# Altium PCB SHT20.PcbDoc
Units mil, origin at the board's own origin, x right, y up, seen from the top; angles counter-clockwise.
Board outline 530 x 835 mil, 2 copper layers (Top Layer, Bottom Layer); 6 components, 4 nets, 19 pads, 4 vias.
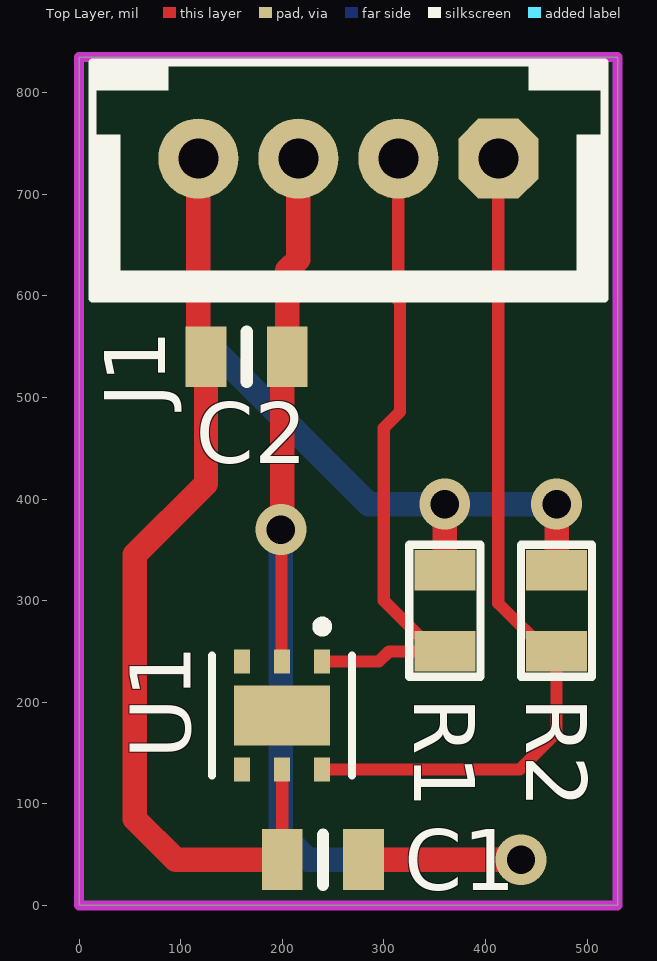
[diagram p0: Top Layer view]
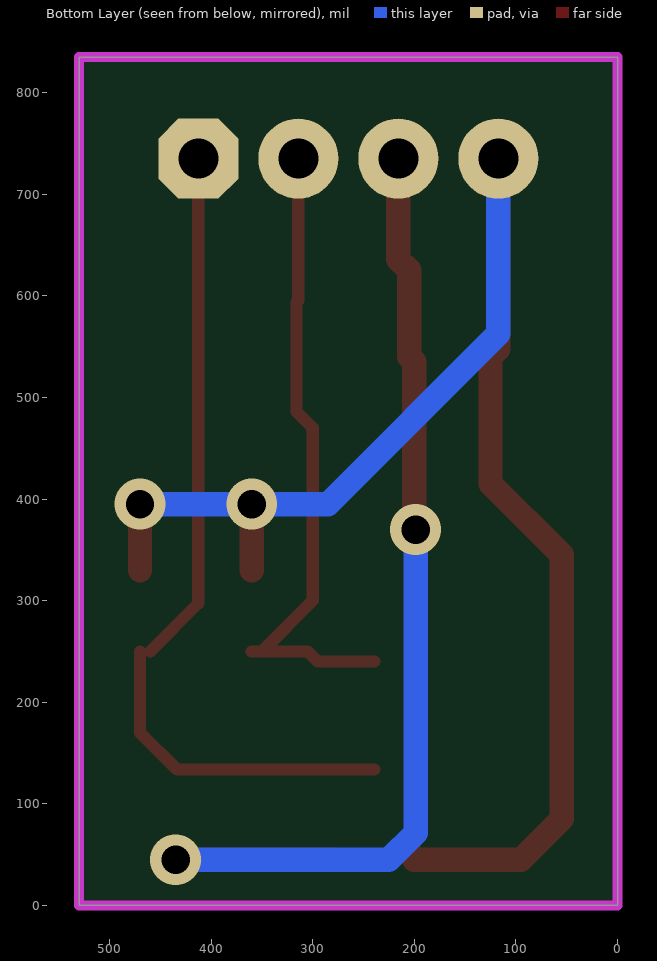
[diagram p1: Bottom Layer view, seen from below]
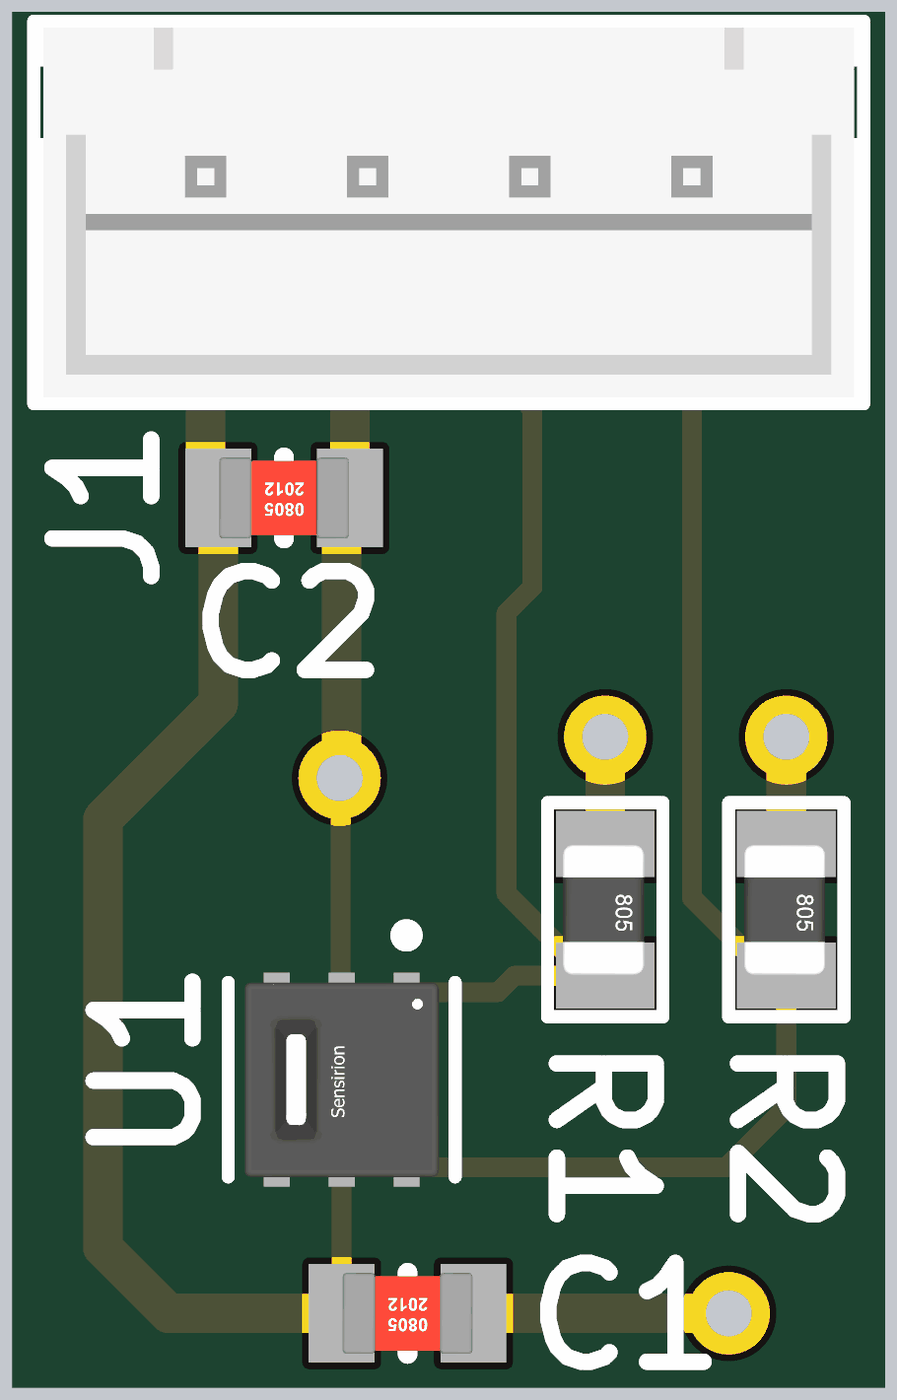
[diagram p2: 3D render of the assembled board from above, using the file's embedded part models]

## Layer stack, top to bottom
Top Solder: solder mask 0.4, Solder Resist, Dk 3.5
Top Layer: signal copper 1.4
Dielectric 1: dielectric 12.6, FR-4, Dk 4.8
Bottom Layer: signal copper 1.4
Bottom Solder: solder mask 0.4, Solder Resist, Dk 3.5

## Board outline
0,0 0,835 530,835 530,0

## Design rules (kind name [scope] priority, off if disabled: settings)
Clearance [All] p1: gap=10 ignorepadtopadclearanceinfootprint=FALSE except(0: Arc-Hole Track-Hole SMDPad-Hole THPad-Hole Via-Hole Fill-Hole Poly-Hole Region-Hole Text-Hole)
PolygonConnect [All] p1: connectstyle=Relief reliefconductorwidth=10 reliefentries=4 polygonreliefangle="90 Angle" airgapwidth=10
RoutingVias [All] p1: holewidth=28 width=50 viastyle="Through Hole" minholewidth=28 minwidth=50 maxholewidth=28 maxwidth=50
SolderMaskExpansion [All] p1: expansion=4 istentingtop=FALSE
Width [All] p1: maxlimit=50 minlimit=10 preferedwidth=24
30 further rules are at their usual default settings.

## Components (designator, comment, footprint, x,y, rotation, side; value= is the part's Value field where it differs from the comment)
C1 "100nF" SMD-0805C 240,45 r90 top value=10000pF
C2 "100nF" SMD-0805C 165,540 r90 top value=10000pF
J1 "SHT20 Mod" XH_4 265,735 r180 top value=HHDR_4
R1 "1K" SMD-0805-RES 360,290 r180 top value=1
R2 "1K" SMD-0805-RES 470,290 r180 top value=1
U1 "SHT20" FP-SHT20-MFG 200,186.85 r270 top

## Footprints (in the part's own frame and the unit in brackets; to place one, negate y for a bottom-side part, rotate by r counter-clockwise, add the part's x,y. Pads: shape width x height; smd on the part's side, far side on the other; paste and mask are expansions set on the pad)
FP-SHT20-MFG [mm]
  rect 0.6x0.4 smd paste+0 mask+0: 1(-1.35,1) 2(-1.35,0) 3(-1.35,-1) 4(1.35,-1) 5(1.35,0) 6(1.35,1)
  rect 1.5x2.4 smd paste+0 mask+0: 7(0,0)
  silkscreen extent -2.35,-1.75 1.5,1.75, body extent -1.75,-1.65 1.75,1.65, height 0.25
SMD-0805-RES [mil]
  rect 60x40 smd: 1(0,40) 2(0,-40)
  silkscreen extent -35,-65 35,65, body extent -24,-39 26,39, height 31
SMD-0805C [mil]
  rect 60x40 smd: 1(0,40) 2(0,-40)
  silkscreen extent -25,0 25,0, body extent -25,-39 25,39, height 35
XH_4 [mm] "PW10-xx-M, JST-BxB-XH-A pitch: 2.5mm"
  oct 2x2 hole 1: 1(-3.75,0)
  round 2 hole 1: 2(-1.25,0) 3(1.25,0) 4(3.75,0)
  silkscreen extent -6.4,-2.4 6.4,3.5, body extent -6.25,-2.3 6.25,3.4, height 7

## Part data
C1 C2: library part GC321AD72E103KX01D, "CAP CER 100nF 50V X7R 0805", Digi-Key Part Number=490-13986-1-ND, Manufacturer="Murata Electronics North America", Operating Temperature="-55°C ~ 125°C", Package / Case="0805 (2012 Metric)", Ratings=AEC-Q200, Temperature Coefficient=X7T, Tolerance=±10%, Voltage=250V, @ qty=0, Applications=Automotive, Datasheets=http://search.murata.co.jp/Ceramy/image/img/A01X/G101/ENG/GC321AD72E103KX01-01.pdf, Factory Stock=0, Features=-, Height - Seated (Max)=-, Image=//media.digikey.com/Renders/Murata%20Renders/0805(GC3)200x125.jpg, Lead Spacing=-, Lead Style=-, Minimum Quantity=1, Mounting Type="Surface Mount, MLCC", Packaging="Cut Tape (CT)", Part Number=GC321AD72E103KX01D, Part Status=Active, Quantity Available=4000, Series=GC3, Size / Dimension="0.079\" L x 0.049\" W (2.00mm x 1.25mm)", Thickness (Max)="0.039\" (1.00mm)", Unit Price (USD)=0.3
J1: library part XH_4, "JST-XH pitch: 2.5mm"
R1 R2: library part ERJ-6BQF1R0V, "1KΩ 0805", Digi-Key Part Number=P17499CT-ND, Manufacturer="Panasonic Electronic Components", Operating Temperature="-55°C ~ 125°C", Package / Case="0805 (2012 Metric)", Power (Watts)="0.333W, 1/3W", Supplier Device Package=0805, Temperature Coefficient=±200ppm/°C, Tolerance=±1%, @ qty=1500, Composition="Thick Film", Datasheets=https://industrial.panasonic.com/cdbs/www-data/pdf/RDA0000/AOA0000C239.pdf, Factory Stock=0, Failure Rate=-, Features="Automotive AEC-Q200, Current Sense", Height - Seated (Max)="0.028\" (0.70mm)", Image=//media.digikey.com/Renders/Panasonic%20Renders/ERJ-0805%20Pkg.jpg, Minimum Quantity=1, Number of Terminations=2, Packaging="Cut Tape (CT)", Part Number=ERJ-6BQF1R0V, Part Status=Active, Quantity Available=808, Series=ERJ, Size / Dimension="0.079\" L x 0.049\" W (2.00mm x 1.25mm)", Unit Price (USD)=0.05834
U1: library part CMP-2000-05344-2, "SENSOR HUMID/TEMP 3V I2C 3% SMD", Manufacturer=Sensirion, Max Supply Voltage=3.6V, Min Supply Voltage=2.1V, Operating Supply Current=300uA, Package=0, Temperature="-40°C to +125°C", Temperature Range High=+125°C, Temperature Range Low=-40°C, Accuracy=3%, Automotive=Yes, Automotive Grade="Grade 1", Category=IC, ComponentLink2Description=Datasheet, ComponentLink2URL=https://www.sensirion.com/fileadmin/user_upload/customers/sensirion/Dokumente/0_Datasheets/Humidity/Sensirion_Humidity_Sensors_SHT20_Datasheet.pdf, Device Class L1=Sensors, Device Class L2="Temperature and Humidity Sensors", Device Class L3=unset, Digikey Description="SENSOR HUMID/TEMP 3V I2C 3% SMD", Height=1.1mm, Interface=I2C, Ipc Land Pattern Name=DFN300X300X110-6, Lead Free=Yes, Manufacturer Part Number=SHT20, Octopart=https://octopart.com/sht20-sensirion-47077745, Resolution=14bits, RoHS=TRUE, Sensor Output=I2C

## Via types
v1: diameter 50, hole 28, Top Layer to Bottom Layer, 4 vias

## Nets (pads, with @x,y where several pads share a name; then routed paths per layer and width w, separated by ;. In a path a pad name is that pad's centre, name@x,y a point inside that pad or via, vN(x,y) a via of type N, cw(c..) or ccw(c..) an arc to the next point about the centre after c; other vN are vias at no path point)
+3V3: C1.1 C2.1 J1.4 R1.2 R2.2 U1.5 | length 1656.9
  Top Layer w12: C1.1 U1.5
  Top Layer w24: J1.4 117.36,547.64 C2.1 125,415 55,345 55,85 95,45 C1.1 ; R1.2 v1(360,395) ; R2.2 v1(470,395)
  Bottom Layer w24: J1.4 117.36,562.64 285,395 v1(360,395) v1(470,395)
GND: C1.2 C2.2 J1.3 U1.2 | length 1197.8
  Top Layer w10: C2.2@200,535 C2.2
  Top Layer w12: v1(198.72,369.91) 199.36,369.27 199.36,240.64 U1.2
  Top Layer w24: v1@200,375 C2.2@200,535 ; C2.2 205,625 215.79,635.79 J1.3 ; C1.2 v1(435,45)
  Bottom Layer w24: v1(198.72,369.91) 198.72,71.28 225,45 v1(435,45)
I2C1_SCL: J1.1 R2.1 U1.6 | length 830.3
  Top Layer w12: U1.6 433.7,133.7 470,170 R2.1 ; J1.1 412.64,297.36 R2.1@460,250
I2C1_SDA: J1.2 R1.1 U1.1 | length 637.7
  Top Layer w12: U1.1 295,240 305,250 R1.1@350,250 ; J1.2 314.21,595.37 315.86,593.73 315.86,485.86 300,470 300,300 R1.1@350,250 ; R1.1 R1.1@350,250
pads on no net: U1.3 U1.4 U1.7

## Keep-outs
Keep-Out Layer:
  lines w10: 0,0 0,670 0,835 5,835 530,835 530,0 0,0

## Silkscreen, mask and mechanical layers (free items; w line width, h text height)
Top 3D Body:
  text "SDA" at 355,425 h78.74 r90
  text "SCL" at 445,425 h78.74 r90